# EAGLE board test1 (EAGLE 7.3.0)
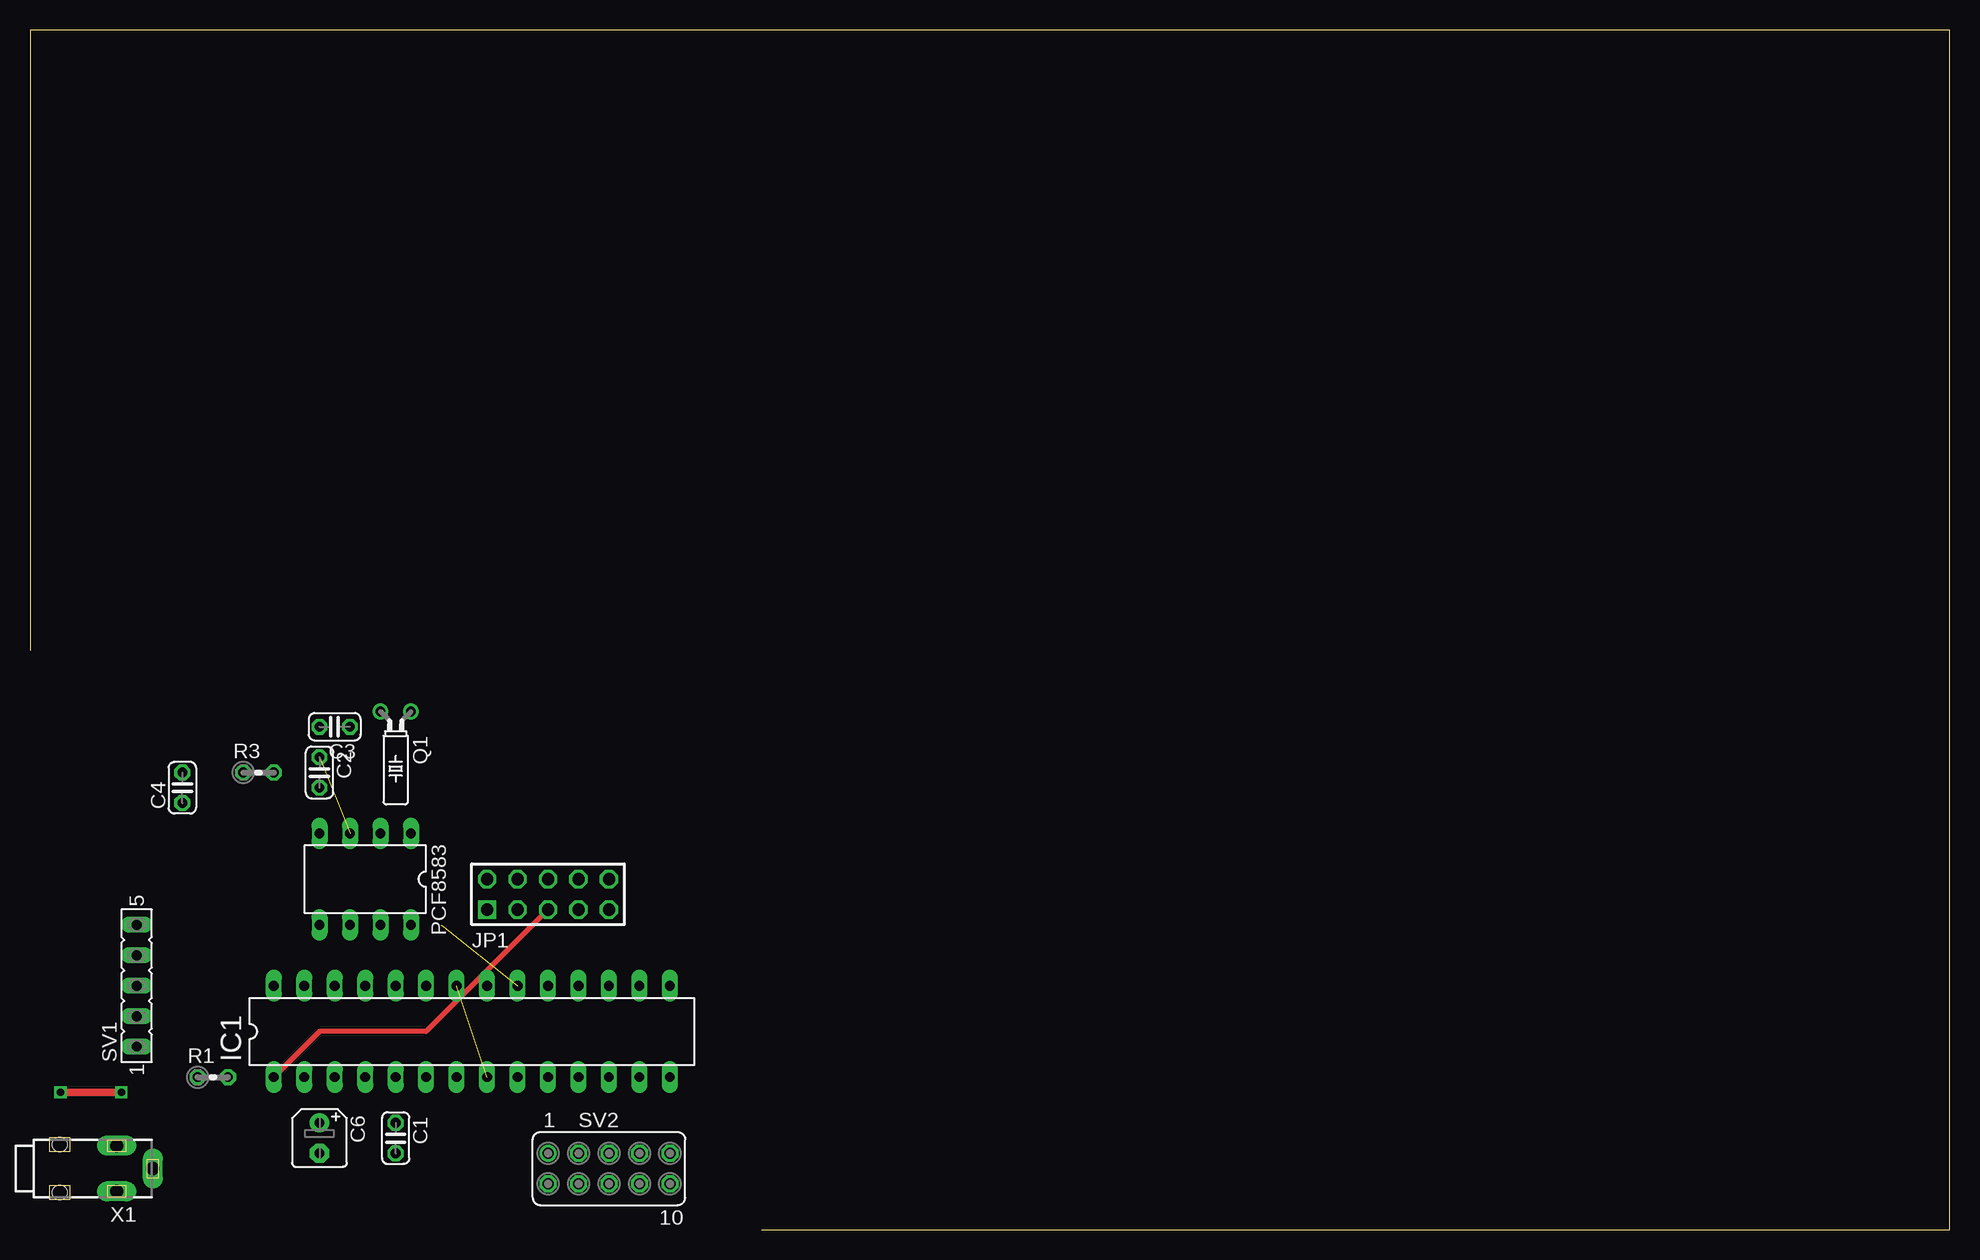
[diagram p0: board, top side]
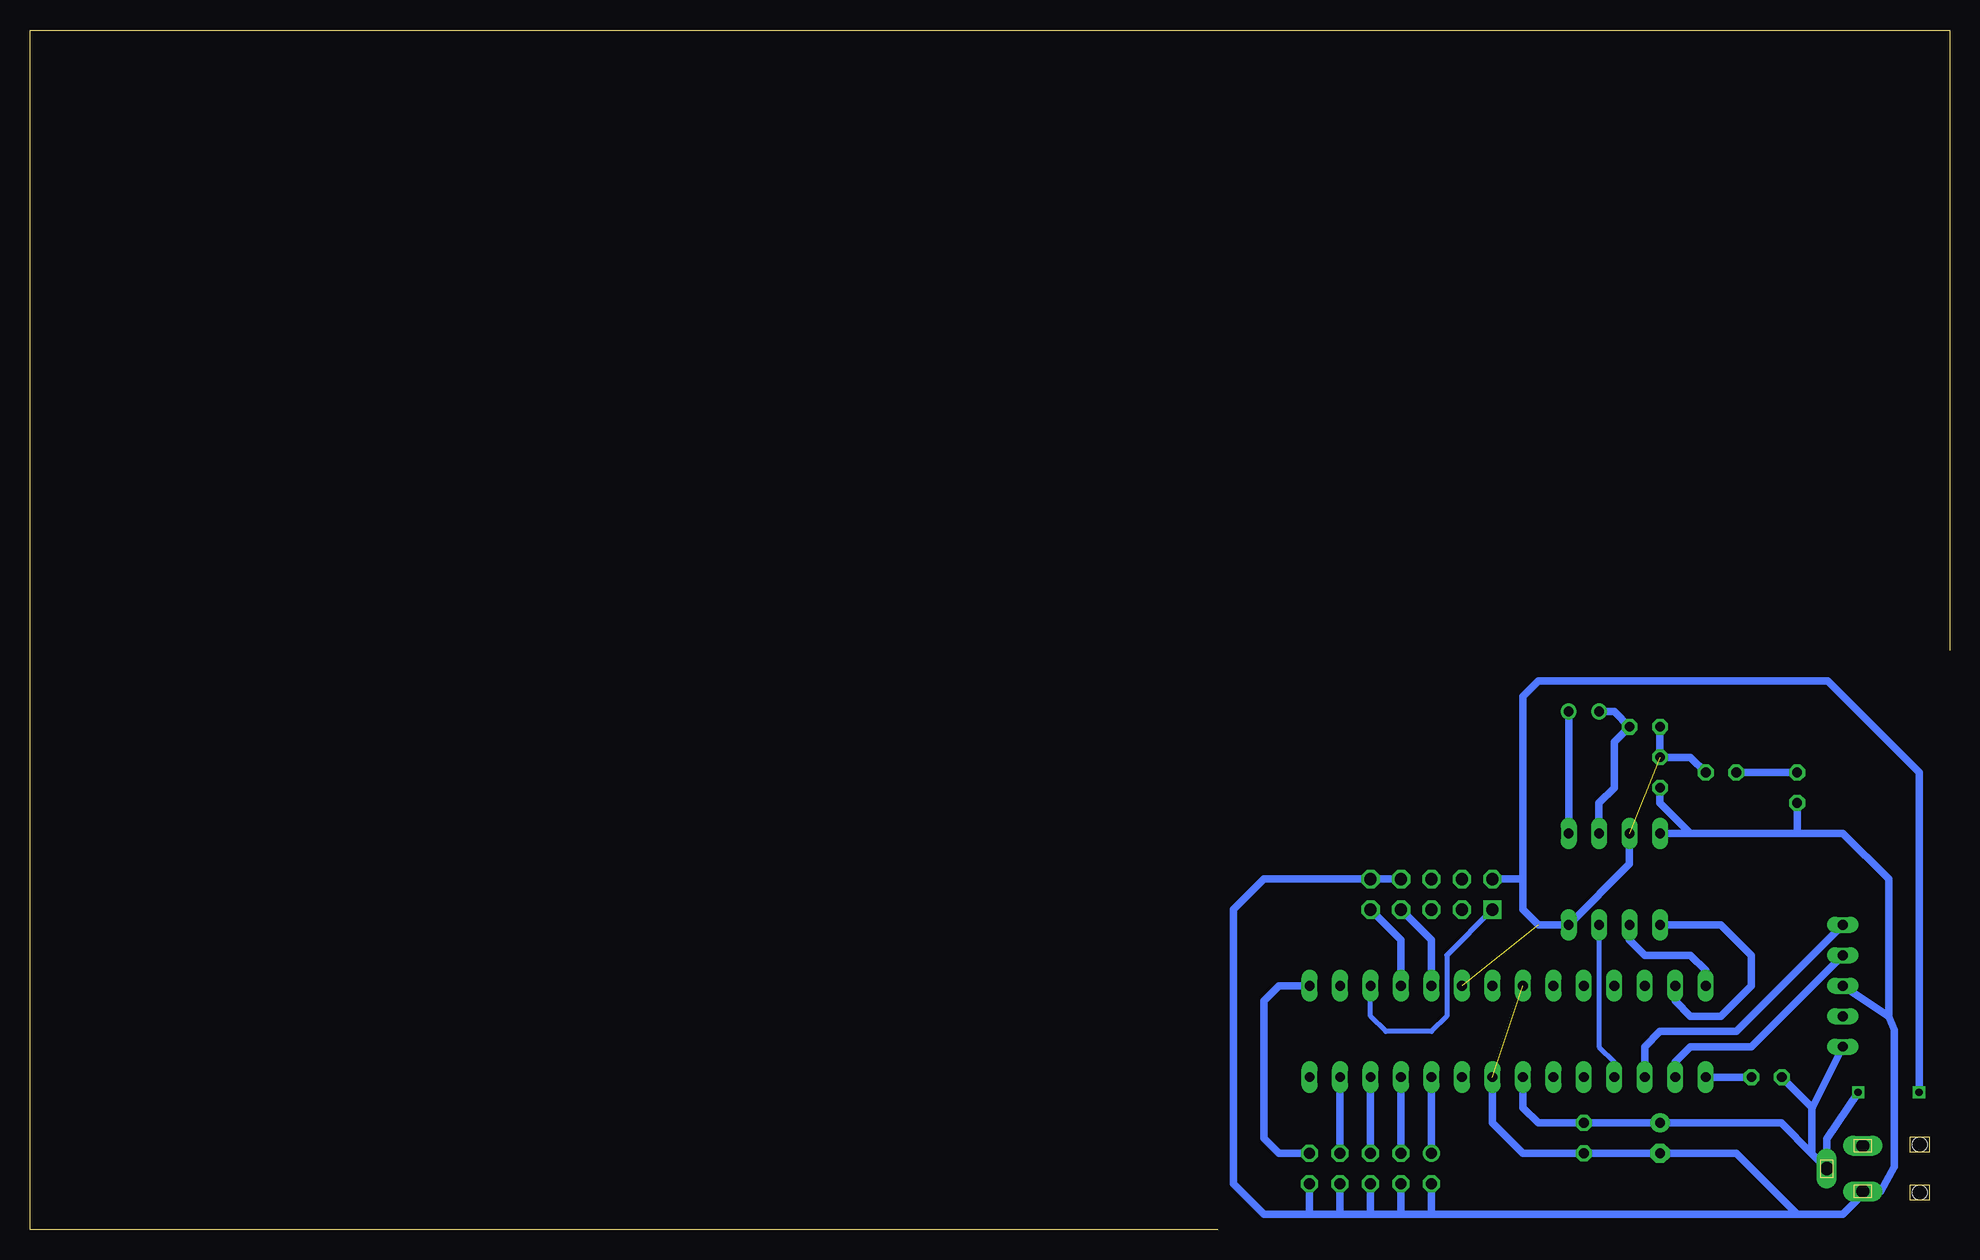
[diagram p1: board, bottom side, seen from below]

Size 160 x 100 mm. Coordinates in mm from the lower left corner, seen from the top.
Outline: 60.96,0 160,0 160,100 0,100 0,48.26
Copper layers (1*16): Top 0.035mm / dielectric 1.5mm / Bottom 0.035mm
Design rules "default": minimum track width 10mil, minimum drill 24mil, track to track 8mil, track to pad 8mil, pad to pad 8mil, via to via 8mil, smd to smd 8mil, copper to edge 40mil, drill to drill 8mil, minimum pad ring 10mil, minimum via ring 8mil, stop-mask expansion 4mil, vias tented up to drill 0mil, thermal gap 10mil

## Footprints (pad centres in the part's own frame; a part is rotated, then mirrored left to right if it is on the bottom)
C025-024X044 = drill 0.813 octagon: 1 -1.27,0; 2 1.27,0
B45181A = drill 0.813 pad 1.6: + -1.27,0 | drill 0.813 pad 1.6 octagon: - 1.27,0
DIL28-3 = drill 0.813 long: 1 -16.51,-3.81; 2 -13.97,-3.81; 3 -11.43,-3.81; 4 -8.89,-3.81; 5 -6.35,-3.81; 6 -3.81,-3.81; 7 -1.27,-3.81; 8 1.27,-3.81; 9 3.81,-3.81; 10 6.35,-3.81; 11 8.89,-3.81; 12 11.43,-3.81; 13 13.97,-3.81; 14 16.51,-3.81; 15 16.51,3.81; 16 13.97,3.81; 17 11.43,3.81; 18 8.89,3.81; 19 6.35,3.81; 20 3.81,3.81; 21 1.27,3.81; 22 -1.27,3.81; 23 -3.81,3.81; 24 -6.35,3.81; 25 -8.89,3.81; 26 -11.43,3.81; 27 -13.97,3.81; 28 -16.51,3.81
AVR-ISP-10 = drill 1.016 square: 1 -5.08,-1.27 | drill 1.016 octagon: 2 -5.08,1.27; 3 -2.54,-1.27; 4 -2.54,1.27; 5 0,-1.27; 6 0,1.27; 7 2.54,-1.27; 8 2.54,1.27; 9 5.08,-1.27; 10 5.08,1.27
DIL08 = drill 0.813 long: 1 -3.81,-3.81; 2 -1.27,-3.81; 3 1.27,-3.81; 4 3.81,-3.81; 5 3.81,3.81; 6 1.27,3.81; 7 -1.27,3.81; 8 -3.81,3.81
TC26H = drill 0.813: 1 -1.27,0; 2 1.27,0
0204V = drill 0.813 octagon: 1 -1.27,0; 2 1.27,0
FE05-1 = drill 0.813 long: 1 -5.08,0; 2 -2.54,0; 3 0,0; 4 2.54,0; 5 5.08,0
FE05-2 = drill 0.914: 1 -5.08,1.27 | drill 0.914 octagon: 2 -5.08,-1.27; 3 -2.54,1.27; 4 -2.54,-1.27; 5 0,1.27; 6 0,-1.27; 7 2.54,1.27; 8 2.54,-1.27; 9 5.08,1.27; 10 5.08,-1.27
1501_05 = drill 1.1 pad 1.4 long: 1 -1.9,-8.5; 2 0,-11.5; 3 1.9,-8.5 | hole 1.2: -2,-3.75; 2,-3.75

## Placement (x,y rotation side)
C1  100nF  [C025-024X044]  30.48,7.62 270 top
C2  100nF  [C025-024X044]  24.13,38.1 270 top
C3  22pF  [C025-024X044]  25.4,41.91 180 top
C4  0,47F  [C025-024X044]  12.7,36.83 90 top
C6  22uF  [B45181A]  24.13,7.62 270 top
IC1  MEGA8-P  [DIL28-3]  36.83,16.51 0 top
JP1  AVR-ISP-10  [AVR-ISP-10]  43.18,27.94 0 top
PCF8583  [DIL08]  27.94,29.21 180 top
Q1  32KHz  [TC26H]  30.48,43.18 180 top
R1  10K  [0204V]  15.24,12.7 0 top
R3  10K  [0204V]  19.05,38.1 0 top
SV1  Atnel-Air  [FE05-1]  8.89,20.32 90 top
SV2  [FE05-2]  48.26,5.08 0 top
X1  1501_04  [1501_05]  -1.27,5.08 90 top

## Library data of the parts
C1-C4 C6 = rcl
IC1 = atmel; OC_FARNELL: unknown; OC_NEWARK: unknown
JP1 = avr-5
PCF8583 = ds1307_pcf8583
Q1 = crystal; OC_FARNELL: unknown; OC_NEWARK: unknown
R1 R3 = resistor
SV1 SV2 = con-lsta; OC_FARNELL: unknown; OC_NEWARK: unknown
X1 = con-lumberg; OC_FARNELL: 1216977; OC_NEWARK: unknown

## Nets
GND: C1.2 C2.2 C4.1 C6.- IC1.8 IC1.22 JP1.8 JP1.10 PCF8583.4 SV1.3 SV2.2 SV2.4 SV2.6 SV2.8 SV2.10 X1.1
INT: IC1.4 PCF8583.7
MISO: IC1.18 JP1.9
MOSI: IC1.17 JP1.1
N$1: IC1.2 SV1.4
N$2: IC1.3 SV1.5
N$3: IC1.10 SV2.1
N$4: IC1.13 SV2.7
N$5: IC1.12 SV2.5
N$7: IC1.15 SV2.9
N$8: IC1.11 SV2.3
N$10: PCF8583.1 Q1.1
N$11: C3.1 PCF8583.2 Q1.2
N$12: C4.2 R3.1
RST: IC1.1 JP1.5 R1.2
SCK: IC1.19 JP1.7
SCL: IC1.28 PCF8583.6
SDA: IC1.27 PCF8583.5
VCC: C1.1 C2.1 C3.2 C6.+ IC1.7 IC1.20 JP1.2 PCF8583.3 PCF8583.8 R1.1 R3.2 SV1.1 X1.2

## Tracks (layer width: path | path; a pad name or v marks a point on that pad's centre or on a via)
GND  (1 unrouted)
  Bottom 0.61: IC1.8 38.1,8.89 35.56,6.35 C1.2 C6.- 17.78,6.35 12.7,1.27 | 12.7,1.27 8.89,1.27 7.23,2.93 X1.1 5.71,3.18 4.6,5.23 4.6,16.66 5.08,17.78 | SV1.3 5.08,17.78 | PCF8583.4 21.59,33.02 | 21.59,33.02 12.7,33.02 | 12.7,33.02 8.89,33.02 5.08,29.21 5.08,17.78 | C4.1 12.7,33.02 | C2.2 24.13,35.56 21.59,33.02 | 53.34,1.27 57.15,1.27 59.69,3.81 59.69,26.67 57.15,29.21 JP1.10 JP1.8 | 53.34,1.27 50.8,1.27 | 50.8,1.27 48.26,1.27 | 48.26,1.27 45.72,1.27 | 45.72,1.27 43.18,1.27 | 43.18,1.27 12.7,1.27 | SV2.2 43.18,1.27 | SV2.10 53.34,1.27 | SV2.8 50.8,1.27 | SV2.6 48.26,1.27 | SV2.4 45.72,1.27
INT
  Bottom 0.406: PCF8583.7 29.21,15.24 27.94,13.97 IC1.4
MISO
  Bottom 0.61: JP1.9 45.72,24.13 IC1.18
MOSI
  Bottom 0.406: JP1.1 41.91,22.86 41.91,17.78 43.18,16.51 46.99,16.51 48.26,17.78 IC1.17
N$1
  Bottom 0.61: IC1.2 22.86,13.97 21.59,15.24 16.51,15.24 SV1.4
N$2
  Bottom 0.61: IC1.3 25.4,15.24 24.13,16.51 17.78,16.51 SV1.5
N$3
  Bottom 0.61: IC1.10 SV2.1
N$4
  Bottom 0.61: SV2.7 IC1.13
N$5
  Bottom 0.61: IC1.12 SV2.5
N$7
  Bottom 0.61: SV2.9 55.88,6.35 57.15,7.62 57.15,19.05 55.88,20.32 IC1.15
N$8
  Bottom 0.61: IC1.11 SV2.3
N$10
  Bottom 0.61: PCF8583.1 Q1.1
N$11
  Bottom 0.61: PCF8583.2 29.21,35.56 27.94,36.83 27.94,40.64 C3.1 27.94,43.18 Q1.2
N$12
  Bottom 0.61: C4.2 R3.1
RST
  Top 0.406: JP1.5 33.02,16.51 24.13,16.51 IC1.1
  Bottom 0.61: R1.2 IC1.1
SCK
  Bottom 0.61: JP1.7 43.18,24.13 IC1.19
SCL
  Bottom 0.61: IC1.28 20.32,21.59 21.59,22.86 25.4,22.86 26.67,24.13 PCF8583.6
SDA
  Bottom 0.61: IC1.27 22.86,19.05 21.59,17.78 19.05,17.78 16.51,20.32 16.51,22.86 19.05,25.4 PCF8583.5
VCC  (via drill 0.6)  (2 unrouted)
  Top 0.61: v2.54,11.43 v7.62,11.43
  Bottom 0.61: 11.46,6.32 X1.2 10.23,7.55 v7.62,11.43 | 11.46,6.32 14.04,8.89 C6.+ C1.1 34.29,8.89 35.56,10.16 IC1.7 | C3.2 C2.1 21.59,39.37 R3.2 | SV1.1 11.43,10.16 | 11.43,10.16 11.46,10.12 11.46,6.32 | R1.1 11.43,10.16 | 35.56,29.21 35.56,26.67 34.29,25.4 PCF8583.8 26.67,30.48 PCF8583.3 | 35.56,29.21 35.56,44.45 34.29,45.72 10.16,45.72 2.54,38.1 v2.54,11.43 | JP1.2 35.56,29.21